# Altium PCB Micromouse_PCB.PcbDoc (part 3 of 3)
Units mm, origin at the board's own origin, x right, y up, seen from the top; angles counter-clockwise.
Board outline 89.28 x 101.5 mm, 2 copper layers (Top Layer, Bottom Layer); 118 components, 108 nets, 360 pads, 157 vias.
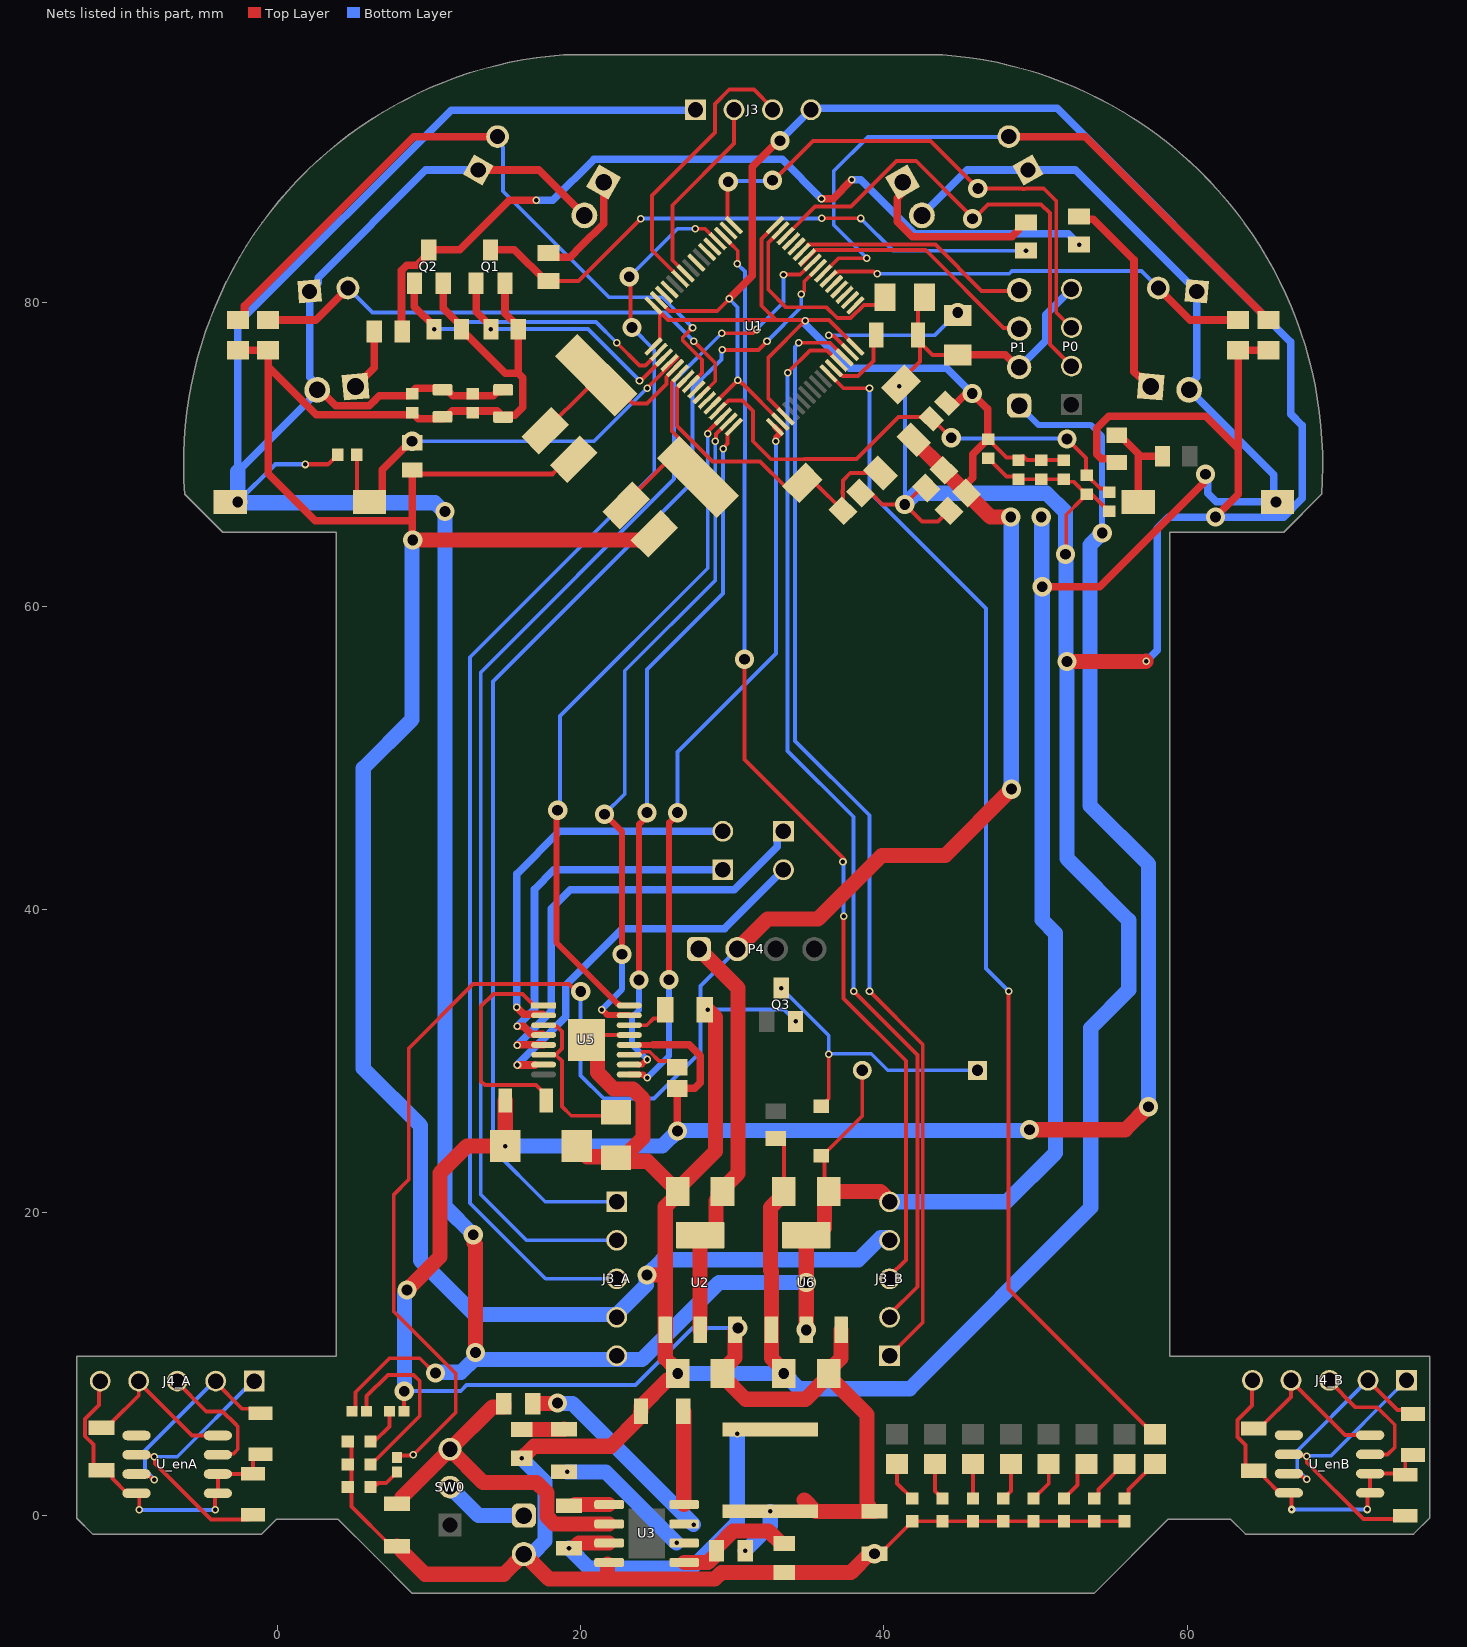
[diagram p2: the nets of this part, all layers, seen from the top]

## Via types
v1: diameter 0.5, hole 0.3, Top Layer to Bottom Layer, 87 vias
v2: diameter 1.27/1.27 (per signal layer), hole 0.711, Top Layer to Bottom Layer, 48 vias
v3: diameter 2, hole 2, Top Layer to Bottom Layer, 11 vias
v4: diameter 1.27, hole 0.711, Top Layer to Bottom Layer, 8 vias
v5: diameter 0.5, hole 0.2, Top Layer to Bottom Layer, 1 vias
v6: diameter 2/2 (per signal layer), hole 2, Top Layer to Bottom Layer, 1 vias
v7: diameter 1, hole 0.3, Top Layer to Bottom Layer, 1 vias

## Nets (pads, with @x,y where several pads share a name; then routed paths per layer and width w, separated by ;. In a path a pad name is that pad's centre, name@x,y a point inside that pad or via, vN(x,y) a via of type N, cw(c..) or ccw(c..) an arc to the next point about the centre after c; other vN are vias at no path point) (continued)
DBL_8: DBL_8.2 U1.27 | length 80
  Top Layer w0.254: U1.27@36.35,75.35 37.325,74.375 v1(39.05,74.375) ; v1(48.225,34.6) 48.225,14.95 57.825,5.35 DBL_8.2@57.875,5.35
  Bottom Layer w0.254: v1(39.05,74.375) 39.052,74.373 39.052,67.523 46.728,59.848 46.728,36.098 v1(48.225,34.6)
DEBUG: C_DB.2 DEBUG.1 R_BT.2 U1.4 | length 28.7
  Top Layer w0.254: C_DB.2@5.227,69.995 5.227,67.548 5.9,66.875 DEBUG.1@6.065,66.875 ; R_BT.2@8.851,70.899 v2(8.875,70.875) ; v1(24.375,74.375) 25.379,75.379 25.379,75.391 U1.4@26.38,76.393
  Top Layer w0.5: DEBUG.1@6.065,66.875 6.365,66.875 6.915,67.425 6.915,68.99 8.7,70.775 R_BT.2@8.875,70.775
  Bottom Layer w0.254: v2(8.875,70.875) 20.875,70.875 v1(24.375,74.375)
F_EM: Q2.1 R_IR2.2 U1.2 | length 20.1
  Top Layer w0.254: v1(22.375,77.375) 23.875,75.875 24.26,75.875 U1.2@25.149,76.764
  Top Layer w0.5: Q2.1@9.025,81.3 9.025,79.75 10.325,78.45 v1(10.325,78.275)
  Bottom Layer w0.254: v1(10.325,78.275) 12.094,78.275 12.571,78.752 20.998,78.752 v1(22.375,77.375)
GND: C1.2 C2.2 C3.1 C4.2 C5.2 C6.2 C7.2 C8.2 C9.2 C10.2 C11.1 C12.2 C13.2 C16.2 C17.2 C18.2 C19.1 C21.2 C22.2 C23.2 C24.2 C27.1 C_IR1.2 C_IR2.1 C_IR3.1 C_IR4.2 D1.1 D3.1 D5.1 D6.1 D7.1 D8.1 D9.1 D10.1 D11.1 D12.1 D13.1 J3.04 J3_A.04 J3_B.04 P0.04 P1.2 P3.2 Q1.2 Q2.2 Q3.2 R5.1 R7.1 R9.2 R12.2 R_BT0_2.1 R_BT.1 R_BUZZ.1 R_IR1.1 R_IR2.1 R_IR7.1 R_IR8.1 R_IR9.1 R_IR10.1 RST.2 U1.12 U1.18 U1.63 U2.1 U3.4 U5.13 U5.17 U6.1 | length 603.2
  Top Layer w0.254: D3.1@4.875,4.875 4.875,0.6 7.5,-2.025 C12.2@7.875,-2.025 ; U5.17@20.375,31.375 20.7,31.7 U5.13@23.2,31.7 ; U1.63@25.149,80.186 25.856,79.479 29.004,79.479 29.796,80.271 v1(29.796,80.275) ; U1.12@28.685,73.229 30.352,74.896 v1(30.352,74.9) ; v1@30.352,74.853 30.466,74.853 30.643,74.675 30.66,74.675 U1.18@33.168,72.168 U1.18@33.589,71.747 ; R_BUZZ.1@32.875,24.875 33.026,24.875 33.399,24.502 C24.2@33.399,21.375 ; C3.1@38.459,67.459 39.141,67.459 39.892,66.708 v4(41.382,66.708) 42.512,65.578 43.578,65.578 C5.2@44.291,66.291 ; C16.2@39.75,-2.525 41.602,-0.673 41.602,-0.648 D5.1@41.875,-0.375 D6.1@43.875,-0.375 D7.1@45.875,-0.375 D8.1@47.875,-0.375 D9.1@49.875,-0.375 D10.1@51.875,-0.375 D11.1@53.875,-0.375 D12.1@55.875,-0.375 ; RST.2@41.124,74.897 42.375,76.148 R9.2@42.375,77.399 ; v4@41.475,66.8 42.466,67.791 C4.2@42.791,67.791 ; C27.1@42.675,80.375 42.251,79.951 R9.2@42.251,77.875 42.251,77.523 R9.2@42.375,77.399 ; C11.1@44.875,76.575 43.199,76.575 R9.2@42.375,77.399 ; C6.2@46.875,69.748 46.902,69.748 48.088,68.562 48.688,68.562 C7.2@48.875,68.375 C8.2@50.375,68.375 C9.2@51.875,68.375 52.04,68.21 52.513,68.21 C22.2@53.348,67.375 ; v2(51.975,63.425) 52.032,63.482 52.032,66.032 53.096,67.096 53.096,67.123 C22.2@53.348,67.375 ; C22.2@53.375,67.375 C22.2@53.348,67.375 ; C22.2@53.435,67.462 53.57,67.328 53.768,67.328 54.848,66.248 C10.2@54.875,66.248
  Top Layer w0.3: R_BT.1@8.875,68.975 9.135,68.715 18.139,68.715 19.124,69.7 C1.2@19.525,69.7
  Top Layer w0.5: R_IR10.1@-2.625,76.875 R_IR9.1@-0.625,76.875 -0.625,75.802 ; 8.764,65.625 2.475,65.625 -0.625,68.725 -0.625,75.802 ; v2@8.875,64.391 R_BT.1@8.875,68.975 ; C_IR1.2@10.875,72.375 9.275,72.375 9.031,72.619 9.004,72.619 C_IR2.1@8.875,72.748 8.746,72.619 8.43,72.619 8.426,72.615 2.562,72.615 -0.625,75.802 ; C_IR1.2@10.875,72.485 11.145,72.485 11.535,72.875 14.475,72.875 C_IR3.1@14.875,72.475 15.005,72.605 15.647,72.605 16.175,73.133 16.175,75.075 15.875,75.375 ; Q2.2@10.925,81.3 10.925,79.65 12.125,78.45 R_IR2.1@12.125,78.275 15.025,75.375 15.875,75.375 ; Q1.2@15,81.3 15,79.325 15.875,78.45 R_IR1.1@15.875,78.275 15.875,75.375 ; v1(29.796,80.275) 30.678,81.157 30.682,81.157 31.31,81.785 31.31,88.98 33.034,90.704 v2(33.144,90.704) ; C11.1@44.875,76.575 48,76.575 48.74,75.835 P1.2@48.875,75.835 ; R_BT0_2.1@55.375,69.475 55.125,69.725 54.343,69.725 54.05,70.018 54.05,71.725 54.85,72.525 61.225,72.525 63.375,70.375 ; v2(61.875,65.875) 63.375,67.375 63.375,70.375 ; R_IR8.1@65.221,76.875 R_IR7.1@63.375,76.875 63.375,70.375
  Top Layer w1: C12.2@7.875,-2.025 7.9,-2.05 8.225,-2.05 8.225,-2.375 9.725,-3.875 14.92,-3.875 P3.2@16.25,-2.545 17.895,-4.19 21.775,-4.19 ; v2(8.911,64.355) 8.913,64.356 24.455,64.356 C2.2@24.862,64.763 ; R5.1@16.305,3.779 16.305,3.973 16.906,4.574 21.999,4.574 23.95,6.525 23.95,6.85 C13.2@23.975,6.875 ; C19.1@19.735,24.375 19.735,24.305 20.23,23.81 20.274,23.81 20.409,23.675 22.075,23.675 R12.2@22.375,23.375 ; U5.17@20.375,31.375 21.105,30.645 21.105,29.222 22.181,28.146 23.445,28.146 24.104,27.487 24.104,24.929 22.55,23.375 24.399,23.375 25.946,21.828 26.122,21.828 C18.2@26.399,21.551 ; U3.4@21.775,-3.19 21.775,-4.19 ; C13.2@23.975,7.2 25.697,8.922 26.122,8.922 26.399,9.199 v2(26.399,9.375) 26.122,9.652 26.122,9.828 25.575,10.375 U2.1@25.575,12.25 25.575,20.375 ; v2(24.375,15.875) 25.475,15.875 ; C18.2@25.646,20.446 26.399,21.199 C18.2@26.399,21.375 C18.2@26.399,21.551 ; v1(28.375,33.375) 28.879,32.871 28.879,24.031 C18.2@26.399,21.551 ; v2(33.399,9.375) 33.399,9.551 32.575,10.375 U6.1@32.575,12.25 32.575,16.114 32.521,16.168 32.521,20.321 33.122,20.922 33.122,21.098 C24.2@33.399,21.375 ; v2(39.375,-2.525) 39.05,-2.525 37.824,-3.751 R7.1@33.425,-3.751 29.278,-3.751 28.84,-4.19 21.775,-4.19 ; v4(52.075,56.35) 52.198,56.35 52.2,56.352 57.277,56.352 v1(57.3,56.375)
  Bottom Layer w0.254: v1(28.375,33.375) 33.4,33.375 v1(34.175,32.6) ; v1(29.796,80.275) 30.352,79.719 v1(30.352,74.9) ; v1(41.027,74.515) 41.027,74.449 41.382,74.094 41.382,66.893 v4@41.475,66.8
  Bottom Layer w0.5: v2(33.144,90.704) J3.04@35.19,92.75 ; J3.04@35.13,92.81 35.171,92.85 51.425,92.85 66.85,77.425 66.85,72.675 67.611,71.914 67.611,67.111 66.375,65.875 v2(61.875,65.875) 58.775,65.875 58.025,65.125 58.025,57.1 v1(57.3,56.375) ; P1.2@48.925,75.77 50.672,77.517 50.672,79.212 P0.04@52.375,80.915
  Bottom Layer w1: v2(8.911,64.355) 8.875,64.319 8.875,52.525 5.65,49.3 5.65,29.5 9.425,25.725 9.425,16.825 12.995,13.255 22.375,13.255 22.496,13.134 22.496,13.376 24.323,15.203 24.323,15.75 v2@24.408,15.835 ; v1(16.104,3.772) 17.65,2.226 17.65,-1.659 16.879,-2.43 16.365,-2.43 P3.2@16.25,-2.545 ; v2(24.375,15.875) 25.375,16.875 38.335,16.875 39.795,18.335 J3_B.04@40.375,18.335 ; v2(26.399,9.375) v2(33.399,9.375) 34.407,8.367 41.703,8.367 53.65,20.314 53.65,32.175 56.15,34.675 56.15,39.275 52.075,43.35 v4(52.075,56.35) 52.025,56.4 52.025,63.375 v2(51.975,63.425) 51.975,66.202 50.727,67.45 42.125,67.45 41.475,66.8 v4(41.382,66.708) ; v2@39.35,-2.55 v2(39.375,-2.525)
GND_inA: C_enA.2 J4_A.04 U_enA.4 | length 11.1
  Top Layer w0.254: C_enA.2@-11.625,5.8 -11.25,5.8 -10.902,6.148 -10.902,6.193 -9.165,7.93 J4_A.04@-9.165,8.871 ; J4_A.04@-9.245,8.875 -5.65,5.28 U_enA.4@-3.943,5.28
GND_inB: C_enB.2 J4_B.04 U_enB.4 | length 11.2
  Top Layer w0.254: C_enB.2@64.296,5.662 63.967,5.745 C_enB.2@64.4,5.745 ; C_enB.2@65.05,6.02 66.86,7.83 J4_B.04@66.86,8.92 ; J4_B.04@66.82,8.9 70.415,5.305 U_enB.4@72.082,5.305
IN1: U1.14 U5.16 | length 45.8
  Top Layer w0.254: U5.16@22.5,33.75 22.5,33.748 22.597,33.65 U5.16@23.2,33.65 ; v1(28.375,71.375) 28.422,71.422 28.422,71.552 U1.14@29.392,72.521
  Top Layer w0.4: v2(18.475,46.525) 18.4,46.45 18.4,37.793 22.442,33.75 U5.16@22.5,33.75
  Bottom Layer w0.254: v2(18.475,46.525) 18.625,46.675 18.625,52.75 28.375,62.5 v1(28.375,71.375)
IN2: U1.15 U5.15 | length 45.8
  Top Layer w0.254: U5.15@23.2,33 U5.15@23.803,33 ; v1(28.875,70.875) 28.922,70.922 28.922,71.344 U1.15@29.745,72.168
  Top Layer w0.4: v1(21.375,33.375) 21.402,33.375 21.717,33.06 21.729,33.06 21.78,33.01 23.191,33.01 U5.15@23.2,33 ; v2(21.575,46.275) 22.725,45.125 v2(22.725,37.025)
  Bottom Layer w0.254: v2(21.575,46.275) 22.907,47.607 22.907,55.732 28.875,61.7 v1(28.875,70.875)
  Bottom Layer w0.4: v1(21.375,33.375) 22.725,34.725 v2(22.725,37.025)
IN3: U1.16 U5.10 | length 45.3
  Top Layer w0.254: v1(29.398,70.375) 29.398,70.442 29.678,70.722 29.678,71.394 U1.16@29.875,71.59
  Top Layer w0.4: U5.10@23.828,29.76 24.035,29.76 24.364,30.088 v1(24.391,30.088) ; v2(23.85,35.325) 23.85,45.615 24.375,46.14 v2(24.375,46.375)
  Bottom Layer w0.254: v2(24.375,46.375) 24.375,55.825 29.375,60.825 29.375,70.352 v1(29.398,70.375)
  Bottom Layer w0.4: v2(23.85,35.325) 23.85,33.355 23.375,32.88 23.375,31.104 v1(24.391,30.088)
IN4: U1.17 U5.9 | length 48
  Top Layer w0.4: U5.9@23.2,29.1 23.818,29.1 23.828,29.09 24.133,29.09 24.348,28.875 v1(24.375,28.875) ; v2(25.825,35.35) 25.825,45.706 26.375,46.256 v2(26.375,46.375) ; U1.17@32.814,71.814 33.15,71.478 33.15,71.394 32.894,71.138 32.894,70.894 v1(32.875,70.875)
  Bottom Layer w0.254: v2(26.375,46.375) 26.375,50.375 32.875,56.875 v1(32.875,70.875)
  Bottom Layer w0.4: v1(24.375,28.875) 25.825,30.325 v2(25.825,35.35)
L_RV: DS6.2 R_IR10.2 U1.8 | length 47.3
  Top Layer w0.254: U1.8@27.271,74.643 28,75.372 28,76.25 26.73,77.52 26.73,77.73 v1(27.375,78.375)
  Top Layer w0.5: R_IR10.2@-2.625,78.875 -2.532,78.875 -2.182,79.225 -2.182,79.818 8.975,90.975 DS6.2@14.51,90.975
  Bottom Layer w0.254: DS6.2@14.51,90.975 14.51,90.638 14.875,90.273 14.875,87.375 21.875,80.375 25.375,80.375 v1(27.375,78.375)
LF_RV: DS7.2 R_IR9.2 U1.10 | length 34.9
  Top Layer w0.254: v1(27.462,77.462) 28.875,76.05 28.875,74.833 U1.10@27.978,73.936
  Top Layer w0.5: R_IR9.2@-0.625,78.875 2.529,78.875 DS7.2@4.64,80.986
  Bottom Layer w0.254: DS7.2@4.64,80.986 6.251,79.375 25.55,79.375 v1(27.462,77.462)
LR_EM: Q1.1 R_IR1.2 U1.3 | length 16.9
  Top Layer w0.254: v1(23.875,74.875) 23.922,74.922 24.014,74.922 U1.3@25.503,76.411
  Top Layer w0.5: Q1.1@13.1,81.3 13.1,79.425 14.075,78.45 v1(14.075,78.275)
  Bottom Layer w0.254: v1(14.075,78.275) 20.475,78.275 v1(23.875,74.875)
Net3_2: 3.2 U3.7 | length 14
  Top Layer w1: 3.2@16.826,7.375 16.826,7.393 16.829,7.396 18.443,7.396 v4(18.464,7.417)
  Bottom Layer w1: v4(18.464,7.417) 18.489,7.392 19.458,7.392 v1(27.45,-0.6)
NetBOOT0_1: BOOT0.1 R_BT0_1.2 R_BT0_2.2 | length 6.7
  Top Layer w0.5: R_BT0_2.2@55.375,71.275 55.55,71.275 56.95,69.875 R_BT0_1.2@58.375,69.875 ; BOOT0.1@56.78,66.875 56.78,70.045
NetC1_1: C1.1 U1.5 Y1.2 | length 11.2
  Top Layer w0.254: C1.1@17.651,71.575 20.51,74.434 21.816,74.434 Y1.2@22.254,73.996 ; Y1.2@22.339,73.629 23.192,73.629 23.446,73.375 24.375,73.375 25.65,74.65 25.65,75.125 26.21,75.685 U1.5@26.21,75.703
NetC2_1: C2.1 U1.6 Y1.1 | length 13.8
  Top Layer w0.254: C2.1@23.025,66.875 25.548,69.397 25.917,69.397 26.798,68.516 Y1.1@27.734,68.516 27.734,69.822 26.004,71.552 26.004,74.753 26.482,75.231 U1.6@26.482,75.25
NetC3_2: C3.2 R2.2 RST.1 U1.7 | length 21.4
  Top Layer w0.254: U1.7@26.835,74.896 26.835,74.878 26.358,74.4 26.358,71.892 28.701,69.549 31.826,69.549 33.462,67.914 34.414,67.914 RST.1@34.626,68.126 35.456,68.126 C3.2@37.291,66.291 37.22,66.362 37.22,67.07 37.291,67.141 37.291,67.419 37.273,67.436 37.273,67.624 37.291,67.642 37.291,68.291 37.779,68.779 R2.2@39.779,68.779
NetC11_2: C11.2 U1.31 | length 11
  Top Layer w0.254: v1(36.375,77.875) 36.422,77.828 36.7,77.828 U1.31@37.764,76.764
  Bottom Layer w0.254: v1(36.375,77.875) 43.375,77.875 v2(44.875,79.375)
NetC13_1: C13.1 U3.8 | length 6.2
  Top Layer w1: C13.1@26.775,6.875 26.8,6.85 26.8,0.745 U3.8@26.825,0.72
NetC14_1: C14.1 U3.6 | length 9.2
  Bottom Layer w1: v1(19.1,2.875) 21.65,2.875 v1(26.325,-1.8)
NetC14_2: C14.2 R5.2 | length 2.8
  Top Layer w1: R5.2@16.101,5.677 16.104,5.68 18.88,5.68 C14.2@18.9,5.7
NetC15_1: C15.1 U3.1 | length 2.3
  Top Layer w1: C15.1@19.575,0.675 19.62,0.72 U3.1@21.875,0.72
NetC15_2: C15.2 L3.1 U3.3 | length 21.2
  Top Layer w1: C15.2@19.55,-2.15 19.88,-1.82 U3.3@21.875,-1.82
  Bottom Layer w1: v1(19.225,-2.15) 20.55,-3.475 27.3,-3.475 30.325,-0.45 v1(30.325,5.4)
NetC20_2: C20.2 U5.11 | length 3.4
  Top Layer w0.254: U5.11@23.2,30.4 23.872,30.4 24.071,30.599 24.554,30.599 25.156,29.998 25.827,29.998 25.875,29.95 C20.2@25.875,29.575
NetC21_1: C21.1 U5.14 | length 3
  Top Layer w0.254: U5.14@23.2,32.35 24.356,32.35 24.793,32.787 25.152,32.787 25.375,33.01 C21.1@25.375,33.517
NetC27_2: C27.2 U1.47 | length 13.3
  Top Layer w0.254: U1.47@33.168,84.783 32.375,83.99 32.375,80.875 33.537,79.713 36.212,79.713 36.923,79.002 37.805,79.002 38.679,79.875 39.575,79.875 C27.2@40.075,80.375
NetD1_2: D1.2 R3.2 | length 1.9
  Top Layer w0.254: D1.2@6.375,1.875 6.648,2.148 7.169,2.148 7.875,2.854 R3.2@7.875,2.875
NetD3_2: D3.2 R10.2 | length 2.4
  Top Layer w0.254: D3.2@6.375,4.875 7.375,5.875 R10.2@7.375,6.875
NetD4_2: D4.2 LS1.1 Q3.3 | length 19.6
  Top Layer w0.254: D4.2@35.875,27.01 35.945,27.01 36.258,27.323 36.258,27.393 36.366,27.501 v1(36.366,30.428)
  Bottom Layer w0.254: v1(33.225,34.8) 36.366,31.659 v1(36.366,30.428) 36.403,30.465 39.163,30.465 40.253,29.375 LS1.1@46.175,29.375
NetD5_2: D5.2 DBL_1.1 | length 2.7
  Top Layer w0.254: DBL_1.1@40.875,3.4 40.875,2.125 D5.2@41.875,1.125
NetD6_2: D6.2 DBL_2.1 | length 2.5
  Top Layer w0.254: DBL_2.1@43.375,3.4 43.375,1.625 D6.2@43.875,1.125
NetD7_2: D7.2 DBL_3.1 | length 2.3
  Top Layer w0.254: D7.2@45.875,1.125 DBL_3.1@45.875,3.4
NetD8_2: D8.2 DBL_4.1 | length 2.5
  Top Layer w0.254: D8.2@47.875,1.125 48.375,1.625 DBL_4.1@48.375,3.4
NetD9_2: D9.2 DBL_5.1 | length 2.7
  Top Layer w0.254: D9.2@49.875,1.125 50.875,2.125 DBL_5.1@50.875,3.4
NetD10_2: D10.2 DBL_6.1 | length 2.9
  Top Layer w0.254: D10.2@51.875,1.125 52.777,2.027 52.777,2.852 53.325,3.4 DBL_6.1@53.375,3.4
NetD11_2: D11.2 DBL_7.1 | length 3.1
  Top Layer w0.254: D11.2@53.875,1.125 54.148,1.398 54.148,1.723 55.825,3.4 DBL_7.1@55.875,3.4
NetD12_2: D12.2 DBL_8.1 | length 3.1
  Top Layer w0.254: D12.2@55.875,1.125 56.148,1.398 56.148,1.723 57.825,3.4 DBL_8.1@57.875,3.4
NetD13_2: D13.2 R13.2 | length 11.8
  Top Layer w0.254: R13.2@5.875,6.875 5.875,7.875 7.275,9.275 8.975,9.275 9.375,8.875 9.375,6.565 6.458,3.648 6.398,3.648 6.375,3.625 D13.2@6.375,3.565
NetDS1_1: DS1.1 R_IR3.2 | length 4.2
  Top Layer w0.5: DS1.1@5.14,74.486 6.375,75.721 R_IR3.2@6.375,78.125
NetDS2_1: DS2.1 R_IR4.2 | length 7.4
  Top Layer w0.5: R_IR4.2@17.875,83.3 18.15,83.025 19.295,83.025 20.039,83.769 21.51,85.24 DS2.1@21.51,87.975
NetDS3_1: DS3.1 R_IR6.2 | length 12.2
  Top Layer w0.5: DS3.1@41.24,87.975 41.24,87.271 40.875,86.906 40.875,85.375 41.875,84.375 48.45,84.375 48.9,84.825 48.9,85.025 49.175,85.3 R_IR6.2@49.375,85.3
NetDS4_1: DS4.1 R_IR5.2 | length 13.8
  Top Layer w0.5: R_IR5.2@52.668,85.525 53.825,85.525 56.5,82.85 56.5,75.475 56.82,75.155 56.941,75.155 DS4.1@57.61,74.486
NetLabel24: U1.45
NetLabel27: U1.50
NetLabel44: U1.54
NetLabel48: U1.53
NetLabel80: U1.56
NetLabel85: U1.37
NetLabel86: U1.44
NetLabel90: U1.61
NetLabel91: U1.62
NetLabel92: U1.33
NetLabel93: U1.34
NetLabel94: U1.35
NetLabel95: U1.36
NetLabel96: U1.9
NetLabel97: U1.11
NetP3_1: P3.1 SW0.2 | length 5.7
  Bottom Layer w1: SW0.2@11.375,1.875 13.255,-0.005 P3.1@16.25,-0.005
NetQ1_3: Q1.3 R_IR4.1 R_IR6.1 | length 38.8
  Top Layer w0.254: R_IR4.1@17.675,81.45 19.85,81.45 v1(23.95,85.55) ; v1(35.887,85.588) 38.463,85.588 v1(38.475,85.575)
  Top Layer w0.5: Q1.3@14.05,83.5 15.625,83.5 R_IR4.1@17.675,81.45
  Bottom Layer w0.254: v1(23.95,85.55) 23.969,85.569 35.869,85.569 v1(35.887,85.588) ; v1(38.475,85.575) 40.6,83.45 v1(49.375,83.45)
NetQ2_3: Q2.3 R_IR3.1 R_IR5.1 | length 55.3
  Top Layer w0.5: R_IR3.1@8.225,78.125 8.175,78.175 8.175,82.145 8.529,82.499 9.174,82.499 9.975,83.3 Q2.3@9.975,83.5 12.013,83.5 15.288,86.775 v1(17.075,86.775) ; v1(35.883,86.887) 36.657,86.887 v1(37.893,88.123)
  Bottom Layer w0.5: v1(17.075,86.775) 18.165,86.775 20.876,89.486 33.285,89.486 v1(35.883,86.887) ; v1(37.893,88.123) 38.465,88.123 42.023,84.565 52.16,84.565 v1(52.875,83.85)
NetR7_2: R7.2 R8.2 U3.5 | length 8
  Top Layer w1: U3.5@26.825,-3.09 28.384,-3.09 28.948,-2.526 28.948,-2.124 30.052,-1.021 32.395,-1.021 33.224,-1.85 R7.2@33.425,-1.85
NetR11_2: R11.2 U5.1 | length 14.8
  Top Layer w0.254: U5.1@17.55,33.65 16.912,33.65 16.154,34.408 14.233,34.408 13.398,33.573 13.398,28.677 13.673,28.402 17.048,28.402 17.725,27.725 R11.2@17.725,27.375
NetR12_1: R12.1 U5.3 U5.6 | length 11.2
  Top Layer w0.254: U5.6@17.55,30.4 18.345,30.4 18.764,29.981 18.764,26.986 19.375,26.375 R12.1@22.375,26.375 ; U5.3@17.55,32.35 18.221,32.35 18.3,32.271 18.355,32.271 18.424,32.271 18.758,31.937 18.758,30.813 18.424,30.479
OUT1: J1.01 U5.4 | length 24.4
  Top Layer w0.5: v1(15.8,32.275) 16.223,32.275 16.738,31.76 U5.4@17.49,31.76
  Bottom Layer w0.5: v1(15.8,32.275) 16.95,33.425 16.95,41.325 18.23,42.605 J1.01@29.375,42.605
OUT2: J1.02 U5.2 | length 25.5
  Top Layer w0.5: v1(15.775,33.525) 16.241,33.06 U5.2@17.49,33.06
  Bottom Layer w0.5: v1(15.775,33.525) 15.775,42.325 18.595,45.145 J1.02@29.375,45.145
OUT3: J2.01 U5.5 | length 29.5
  Top Layer w0.5: v1(15.8,31.025) 15.825,31.05 U5.5@17.55,31.05
  Bottom Layer w0.5: v1(15.8,31.025) 18.058,33.283 18.058,40.033 19.3,41.275 30.117,41.275 32.966,44.124 32.966,44.736 J2.01@33.375,45.145
OUT4: J2.02 U5.7 | length 25.2
  Top Layer w0.5: v1(15.825,29.725) U5.7@16.972,29.725
  Bottom Layer w0.5: v1(15.825,29.725) 19.008,32.908 19.008,34.986 22.734,38.712 29.482,38.712 J2.02@33.375,42.605
OUT_A: J4_A.03 U_enA.3 | length 8.3
  Top Layer w0.254: J4_A.03@-6.705,8.875 -4.705,6.875 -3.644,6.875 -2.778,6.028 -2.629,5.879 -2.629,4.371 -2.919,4.081 -3.872,4.081 U_enA.3@-3.943,4.01
OUT_B: J4_B.03 U_enB.3 | length 8.8
  Top Layer w0.254: J4_B.03@69.36,8.9 71.12,7.14 72.55,7.14 73.7,5.99 73.7,4.5 73.235,4.035 U_enB.3@72.082,4.035
OUT_enA: J3_A.03 U1.52 | length 86.1
  Top Layer w0.254: v4(23.2,81.725) 23.287,81.638 23.287,78.463 v2(23.375,78.375) ; v1(27.55,84.9) 28.195,84.9 29.02,84.076 U1.52@29.038,84.076
  Bottom Layer w0.254: J3_A.03@22.375,15.62 17.686,15.62 12.7,20.606 12.7,56.625 24.852,68.777 24.852,76.898 v2(23.375,78.375) ; v4(23.2,81.725) 26.375,84.9 v1(27.55,84.9)
OUT_enB: J3_B.03 U1.51 | length 74.1
  Top Layer w0.254: U1.51@29.393,84.409 29.869,83.934 29.869,83.931 30.358,83.442 30.358,82.608 v1(30.325,82.575) ; v2(30.8,56.5) 30.8,49.875 37.338,43.337 v1@37.338,43.125 ; v1@37.338,39.525 37.338,34.112 41.449,30.001 41.449,16.869 J3_B.03@40.375,15.795
  Bottom Layer w0.254: v1(30.325,82.575) 30.829,82.071 30.829,69.535 30.8,69.506 v2(30.8,56.5) ; v1(37.3,43.125) 37.325,43.1 37.325,39.55 v1(37.35,39.525)
PB2: R9.1 U1.28 | length 4.9
  Top Layer w0.254: U1.28@36.703,75.703 36.722,75.703 37.25,75.175 38.3,75.175 39.307,76.182 39.307,77.683 R9.1@39.437,77.813
PushA: U_enA.5
PushB: U_enB.5
R_RV: DS8.2 R_IR8.2 U1.39 | length 44.6
  Top Layer w0.254: U1.39@35.996,81.954 36.993,82.951 v1(38.878,82.951)
  Top Layer w0.5: DS8.2@48.24,90.975 53.275,90.975 R_IR8.2@65.375,78.875
  Bottom Layer w0.254: v1(38.878,82.951) 36.695,85.134 36.695,88.703 38.942,90.95 48.215,90.95 DS8.2@48.24,90.975
RF_RV: DS5.2 R_IR7.2 U1.38 | length 28.7
  Top Layer w0.254: U1.38@36.35,81.601 36.771,82.021 36.959,82.021 37.016,82.078 39.33,82.078 39.483,81.925 v1(39.55,81.925)
  Top Layer w0.5: DS5.2@58.11,80.986 60.221,78.875 R_IR7.2@63.375,78.875
  Bottom Layer w0.254: v1(39.55,81.925) 48.269,81.925 48.443,82.1 56.996,82.1 DS5.2@58.11,80.986
RX: P1.4 U1.43 | length 15.2
  Top Layer w0.254: U1.43@35.003,83.847 43.403,83.847 46.45,80.8 48.875,80.8 P1.4@48.925,80.85
SCL: J3.02 U1.58 | length 12.8
  Top Layer w0.254: U1.58@26.917,81.954 26.05,82.821 26.05,86.45 30.11,90.51 J3.02@30.11,92.75
SCL_A: J4_A.02 R18.1 U_enA.7 | length 13.9
  Top Layer w0.254: U_enA.7@-9.307,2.74 -8.588,2.74 -8.27,2.422 -8.172,2.422 v1(-8.125,2.375) ; J4_A.02@-4.165,8.875 -2.338,7.048 -1.448,7.048 R18.1@-1.125,6.725
  Bottom Layer w0.254: v1(-8.125,2.375) -8.756,3.006 -8.756,4.284 J4_A.02@-4.165,8.875
SCL_B: J4_B.02 R16.1 U_enB.7 | length 13.9
  Top Layer w0.254: U_enB.7@66.718,2.765 67.437,2.765 67.755,2.447 67.853,2.447 v1(67.9,2.4) ; J4_B.02@71.94,8.92 73.892,6.968 74.682,6.968 R16.1@74.9,6.75
  Bottom Layer w0.254: v1(67.9,2.4) 67.269,3.031 67.269,4.269 J4_B.02@71.9,8.9
SCL_enA: J3_A.02 U1.41 | length 82.7
  Top Layer w0.254: v1(29.3,78) 31.353,78 31.603,78.25 v1(31.625,78.25) ; v1(33.375,81.875) 34.484,81.875 35.271,82.661 U1.41@35.289,82.661
  Bottom Layer w0.254: J3_A.02@22.375,18.16 16.416,18.16 13.4,21.176 13.4,55.625 26.15,68.375 26.15,74.85 v1(29.3,78) ; v1(31.625,78.25) 31.625,78.3 33.375,80.05 v1(33.375,81.875)
SCL_enB: J3_B.02 U1.29 | length 70.8
  Top Layer w0.254: v1(33.65,75.4) 35.125,76.875 36.239,76.875 U1.29@37.057,76.057 ; v1(38,34.6) 42.211,30.389 42.211,15.091 J3_B.02@40.375,13.255
  Bottom Layer w0.254: v1(33.65,75.4) 33.65,50.45 38,46.1 v1(38,34.6)
SDA: J3.03 U1.59 | length 18.8
  Top Layer w0.254: U1.59@26.564,81.601 26.564,81.619 24.7,83.483 24.7,87.1 28.85,91.25 28.85,93.125 29.8,94.075 31.426,94.075 32.65,92.851 J3.03@32.65,92.75
SDA_A: J4_A.01 R19.1 U_enA.6 | length 18.4
  Top Layer w0.254: U_enA.6@-9.307,4.01 -9.236,3.938 -8.255,3.938 -8.192,3.875 v1(-8.125,3.875) -8.078,3.828 -8.078,3.436 -4.386,-0.256 -1.906,-0.256 R19.1@-1.625,0.025
  Bottom Layer w0.254: v1(-8.125,3.875) -6.625,3.875 J4_A.01@-1.625,8.875
SDA_B: J4_B.01 R17.1 U_enB.6 | length 18.4
  Top Layer w0.254: U_enB.6@66.718,4.035 66.789,3.963 67.77,3.963 67.833,3.9 v1(67.9,3.9) 67.9,3.508 71.639,-0.231 74.119,-0.231 R17.1@74.4,0.05
  Bottom Layer w0.254: v1(67.9,3.9) 67.947,3.947 69.487,3.947 73.902,8.362 73.922,8.362 74.44,8.88 J4_B.01@74.44,8.9
SDA_enA: J3_A.01 U1.40 | length 78
  Top Layer w0.254: v1(29.325,76.9) 31.727,76.9 v1(32.288,77.462) ; v1(34.55,80.575) 34.744,80.769 34.744,81.409 U1.40@35.643,82.308
  Bottom Layer w0.254: J3_A.01@22.375,20.7 17.662,20.7 14.21,24.151 14.21,55.036 27.375,68.2 27.375,74.375 29.278,76.278 29.278,76.853 v1(29.325,76.9) ; v1(32.288,77.462) 34.55,79.723 v1(34.55,80.575)
SDA_enB: J3_B.01 U1.30 | length 74.7
  Top Layer w0.254: v1(34.375,77.375) 36.446,77.375 U1.30@37.411,76.411 ; v1(39.05,34.6) 42.565,31.085 42.565,12.73 40.55,10.715 J3_B.01@40.375,10.715
  Bottom Layer w0.254: v1(34.375,77.375) 34.375,77.339 34.14,77.103 34.14,51.11 39.05,46.2 v1(39.05,34.6)
SWCLK: P0.03 U1.49 | length 36.2
  Top Layer w0.254: v2(29.725,88) 29.678,87.953 29.678,85.557 U1.49@30.005,85.23 ; v2@32.625,87.975 35.325,90.675 43.075,90.675 v2(46.2,87.55) 49.115,87.55 49.141,87.524 49.296,87.524 49.409,87.55 50.55,87.55 51.375,86.725 51.375,79.375 P0.03@52.375,78.375
  Bottom Layer w0.254: v2(29.725,88) 29.775,88.05 32.6,88.05 v2(32.65,88.1)
SWDIO: P0.02 U1.46 | length 32.4
  Top Layer w0.254: U1.46@33.521,84.429 35.45,86.358 37.83,86.358 40.835,89.363 42.137,89.363 45.85,85.65 v2(45.85,85.55) 45.925,85.55 46.875,86.5 50.375,86.5 50.95,85.925 50.95,77.26 P0.02@52.375,75.835
TX: P1.3 U1.42 | length 16.9
  Top Layer w0.254: U1.42@34.545,82.545 35.493,83.493 42.757,83.493 47.893,78.357 48.893,78.357 P1.3@48.95,78.3
V33: BOOT0.2 C24.1 C_DB.1 C_IR1.1 C_IR2.2 C_IR3.2 C_IR4.1 D4.1 DEBUG.2 DS1.2 DS2.2 DS3.2 DS4.2 DS5.1 DS6.1 DS7.1 DS8.1 J3.01 J3_A.05 J3_B.05 LS1.2 R13.1 U6.2 U6.4 | length 348.6
  Top Layer w0.254: R13.1@4.918,6.875 4.927,6.875 5.136,7.084 5.136,8.136 7.375,10.375 9.375,10.375 10.351,9.399 v2(10.415,9.399) ; D4.1@35.875,23.74 D4.1@35.945,23.74 ; C24.1@36.351,21.375 36.075,21.651 36.075,23.61 D4.1@35.945,23.74 ; LS1.2@38.575,29.375 38.575,26.37 D4.1@35.945,23.74
  Top Layer w0.3: v1(1.825,69.345) 3.323,69.345 3.717,69.739 3.744,69.739 3.973,69.968 C_DB.1@3.973,69.995
  Top Layer w0.5: DS1.2@2.61,74.264 2.774,74.264 3.823,73.215 6.058,73.215 6.411,73.568 6.411,73.582 6.704,73.875 8.605,73.875 9.105,74.375 C_IR1.1@10.875,74.375 ; C_IR1.1@10.875,74.275 11.145,74.275 11.545,73.875 14.215,73.875 14.475,74.135 14.745,74.135 C_IR3.2@14.875,74.265 ; DS6.1@13.24,88.775 17.24,88.775 DS2.2@20.24,85.775 ; v2(50.45,61.275) 54.25,61.275 61.067,68.092 61.067,68.553 v2(61.214,68.7)
  Top Layer w1: v2(12.908,18.527) 12.96,18.475 12.96,17.987 13.05,17.897 v2(13.05,10.75) ; v2(34.875,12.25) v2(34.875,15.375) U6.4@34.875,18.5 35.6,18.5 36.073,18.973 36.073,21.098 C24.1@36.145,21.026 ; C24.1@36.351,21.375 39.775,21.375 40.275,20.875 J3_B.05@40.375,20.875
  Bottom Layer w0.3: v2(-2.625,66.875) -0.155,69.345 v1(1.825,69.345)
  Bottom Layer w0.5: DS6.1@13.24,88.775 9.775,88.775 2.672,81.672 2.672,81.327 DS7.1@2.11,80.764 2.11,75.089 2.61,74.589 DS1.2@2.61,74.264 2.61,74.11 -2.625,68.875 -2.625,78.65 11.45,92.725 J3.01@27.545,92.725 ; DS3.2@42.51,85.775 45.51,88.775 DS8.1@49.51,88.775 52.629,88.775 DS5.1@60.64,80.764 60.64,75.089 60.14,74.589 DS4.2@60.14,74.264 65.728,68.677 65.728,67.022 v2(65.875,66.875) 61.935,66.875 61.361,67.449 61.361,68.553 v2(61.214,68.7)
  Bottom Layer w1: v2(-2.625,66.875) -2.625,68.875 ; v2@-2.573,66.823 -2.382,66.823 10.389,66.823 10.977,66.235 v2(11.05,66.235) ; v2(10.415,9.399) 10.466,9.45 12.11,9.45 12.955,10.295 24.049,10.295 29.129,15.375 v2(34.875,15.375) ; v2@11.05,66.025 11.05,20.385 v2(12.908,18.527) ; J3_B.05@40.375,20.7 48.1,20.7 51.325,23.925 51.325,38.412 50.45,39.287 v2(50.45,61.275) 50.412,61.313 50.412,65.838 v2(50.375,65.875)
V_inA: C_enA.1 J4_A.05 R18.2 R19.2 U_enA.1 U_enA.2 U_enA.8 | length 22.6
  Top Layer w0.254: C_enA.1@-12.15,2.85 -12.15,4.679 -12.702,5.231 -12.702,6.369 -11.785,7.286 J4_A.05@-11.785,8.875 ; C_enA.1@-11.625,3 C_enA.1@-10.875,3 ; C_enA.1@-11.546,2.921 -11.171,2.921 -10.902,2.652 -10.902,2.447 -9.925,1.47 U_enA.8@-9.307,1.47 -9.299,1.47 -9.125,1.297 v1(-9.125,0.375) ; v1(-4.125,0.375) -4.125,1.297 -3.951,1.47 U_enA.1@-3.943,1.47 U_enA.2@-3.943,2.74 -1.64,2.74 -1.625,2.725 R18.2@-1.625,4.025
  Bottom Layer w0.254: v1(-9.125,0.375) v1(-4.125,0.375)
V_inB: C_enB.1 J4_B.05 R16.2 R17.2 U_enB.1 U_enB.2 U_enB.8 | length 21.2
  Top Layer w0.254: C_enB.1@63.852,2.873 63.852,4.647 63.323,5.176 63.323,6.314 64.28,7.271 J4_B.05@64.28,8.9 ; C_enB.1@65.123,2.472 66.1,1.495 U_enB.8@66.718,1.495 66.726,1.495 66.9,1.322 v5(66.9,0.4) ; v1(71.9,0.4) 71.9,1.322 72.074,1.495 U_enB.1@72.082,1.495 U_enB.2@72.082,2.765 74.385,2.765 74.4,2.75 74.4,3.727 74.723,4.05 R16.2@74.9,4.05
  Bottom Layer w0.254: v5(66.9,0.4) v1(71.9,0.4)
VDD33: C4.1 C5.1 C6.1 C7.1 C8.1 C9.1 L1.1 P4.2 R2.1 R3.1 U1.1 U1.19 U1.32 U1.48 U1.64 | length 176.6
  Top Layer w0.254: R3.1@7.875,3.832 7.993,3.95 8.914,3.95 11.75,6.786 11.75,9.364 7.667,13.447 7.667,21.192 8.65,22.175 8.65,30.825 12.9,35.075 19.22,35.075 19.718,34.578 v2(19.993,34.578) ; U1.1@24.796,77.118 25.216,77.538 U1.64@25.216,79.412 ; U1.64@24.796,79.833 U1.64@25.216,79.412 ; U1.48@32.814,85.136 32.814,85.118 31.929,84.233 31.929,79.821 32.875,78.875 ; U1.19@33.521,72.521 33.101,72.942 33.101,72.961 32.375,73.686 32.375,76.4 v1(34.8,78.825) 34.753,78.872 34.409,78.872 34.407,78.875 32.875,78.875 ; v1@34.759,78.866 36.387,78.866 38.118,77.136 U1.32@38.118,77.118 ; 44.701,68.375 44.717,68.359 ; C6.1@46.902,71.002 48.088,69.816 48.688,69.816 C7.1@48.875,69.629 ; C7.1@49.169,69.896 49.435,69.629 C8.1@50.375,69.629 C9.1@51.875,69.629 ; U1.64@25.216,79.412 25.754,78.875 32.875,78.875
  Top Layer w0.5: L1.1@44.162,73.388 44.269,73.282 44.661,73.282 45.258,73.878 45.678,73.878 v2(45.825,74.025) 46.848,73.002 46.848,71.131 46.875,71.104 C6.1@46.875,71.002 ; C5.1@45.459,67.459 45.433,67.485 45.433,68.018 45.875,68.46 45.875,70.029 C6.1@46.848,71.002
  Top Layer w1: P4.2@30.335,37.375 32.31,39.35 35.663,39.35 39.863,43.55 44.05,43.55 v4(48.425,47.925) ; R2.1@41.971,70.971 41.971,70.959 43.959,68.971 C4.1@43.959,68.959 C5.1@45.459,67.459 47.034,65.883 48.367,65.883 v2(48.375,65.875)
  Bottom Layer w0.254: v2(19.993,34.578) 19.993,29.033 21.514,27.512 24.836,27.512 27.898,30.573 27.898,34.938 P4.2@30.335,37.375
  Bottom Layer w0.5: v1(34.8,78.825) 34.8,78.601 37.701,75.7 44.15,75.7 v2(45.825,74.025)
  Bottom Layer w1: v2(48.375,65.875) 48.4,65.85 48.4,47.95 v4(48.425,47.925)
  other v1: 8.961,3.998
VDD33_OUT: C18.1 P4.1 U2.2 U2.4 | length 27.8
  Top Layer w1: P4.1@27.795,37.375 30.375,34.795 30.375,22.575 C18.1@29.073,21.273 ; U2.2@27.875,12.25 U2.4@27.875,18.5 28.55,18.5 28.925,18.875 28.925,20.773 29.351,21.199 C18.1@29.351,21.375
VDDA: C10.1 C22.1 L1.2 U1.13 | length 32.8
  Top Layer w0.254: U1.13@29.038,72.875 29.057,72.875 29.757,73.575 30.67,73.575 31.375,72.87 31.375,70.875 32.558,69.692 34.739,69.692 34.744,69.696 38.196,69.696 40.968,72.468 43.03,72.468 L1.2@43.136,72.362 43.183,72.362 v2(44.442,71.103) ; v2(52.075,71.025) 53.325,69.775 53.325,68.679 C22.1@53.375,68.629 53.402,68.629 54.277,67.754 54.623,67.754 C10.1@54.875,67.502
  Bottom Layer w0.254: v2(44.442,71.103) 44.481,71.064 52.036,71.064 v2(52.075,71.025)
VIN74: 3.1 C12.1 SW0.3 U3.2 | length 23.3
  Top Layer w1: C12.1@8.225,0.8 8.225,1.225 SW0.3@11.375,4.375 ; 3.1@14.924,7.375 14.924,7.174 14.921,7.171 14.171,7.171 SW0.3@11.375,4.375 ; U3.2@21.875,-0.55 18.251,-0.55 17.775,-0.073 17.775,1.5 17.085,2.19 13.56,2.19 SW0.3@11.375,4.375
VOUT5: C16.1 C17.1 C19.2 C20.1 C23.1 L3.2 P1.1 R8.1 R10.1 R11.1 U2.3 U5.12 U6.3 | length 188.8
  Top Layer w0.254: R10.1@8.332,6.875 8.346,6.888 8.346,8.19 v2(8.359,8.204)
  Top Layer w0.4: U5.12@23.2,31.05 24.778,31.05
  Top Layer w0.5: 24.778,31.05 27.161,31.05 27.875,30.336 27.875,28.564 27.507,28.196 26.396,28.196 C20.1@26.375,28.175 v2(26.375,25.375)
  Top Layer w1: v2(8.529,14.885) 10.715,17.071 10.715,22.591 12.499,24.375 v7(15.015,24.375) 15.02,24.38 15.02,27.37 R11.1@15.025,27.375 ; U2.3@30.175,12.25 30.175,10.414 29.628,9.867 29.628,9.652 C17.1@29.351,9.375 29.351,9.199 30.882,7.668 34.819,7.668 36.351,9.199 38.875,6.675 38.875,0.775 C16.1@39.025,0.625 ; 34.75,1.025 35.5,0.275 C16.1@39.375,0.275 39.35,0.3 C16.1@39.025,0.3 ; C23.1@36.351,9.375 36.351,9.551 37.175,10.375 U6.3@37.175,12.25 ; v4(49.6,25.45) 55.925,25.45 v4(57.45,26.975)
  Bottom Layer w0.254: v2(8.359,8.204) 8.375,8.22 12.079,8.22 12.467,8.608 23.608,8.608 27.375,12.375 v2(30.375,12.375)
  Bottom Layer w0.4: P1.1@48.925,73.23 50.195,71.96 53.64,71.96 54.4,71.2 v4(54.4,64.825)
  Bottom Layer w1: v2@8.367,8.212 8.367,14.65 8.529,14.812 v2(8.529,14.885) ; v7(15.015,24.375) 25.375,24.375 26.413,25.413 49.562,25.413 v4(49.6,25.45) ; v1(30.85,-2.325) 32.5,-0.675 v1(32.5,0.275) ; v4(54.4,64.825) 53.6,64.025 53.6,46.825 57.45,42.975 v4(57.45,26.975)
pads on no net: P0.01 P4.3 P4.4 SW0.1 U1.55 U3.9 U5.8
copper on no net: | length 0.4
  Top Layer w0.254: 35.546,87.225 35.685,87.364 35.92,87.364
  other v3: 6.375,22.875 56.375,22.875 53.875,38.125 20.875,39.375 41.875,39.375 20.875,48.625 41.875,48.625 20.875,57.875 41.875,57.875 6.375,59.875 56.375,59.875
  other v6: 8.875,38.125

## Silkscreen, mask and mechanical layers (free items; w line width, h text height)
Top Overlay:
  lines w0.1: 5.775,59.875 6.375,59.875 6.6,59.875 ; 53.85,8.875 53.85,8.861 53.875,8.886
  lines w0.254: 20.872,39.381 20.878,39.375 ; 41.85,64.875 41.875,64.85 ; 20.875,57.875 20.875,57.875
  lines w0.3: 62.925,7.775 63.05,7.65
  text "RV" at 43.729,91.879 h1.52
  text "RV" at 16.354,91.579 h1.52
  text "SCL" at 30.421,87.154 h1.52 r90
  text "GND" at 35.629,87.141 h1.52 r90
  text "SDA" at 33.221,86.979 h1.52 r90
  text "VCC" at 27.971,86.804 h1.52 r90
  text "RV" at 57.229,84.879 h1.52
  text "RV" at 5.229,84.729 h1.52
  text "RX" at 45.129,81.104 h1.52
  text "-" at 54.279,80.368 h1.52
  text "TX" at 46.029,78.354 h1.52
  text "CLK" at 53.899,77.359 h1.52
  text "DIO" at 54.004,75.179 h1.52
  text "---" at 26.804,39.343 h1.52
  text "+" at 42.529,20.05 h1.52
  text "-" at 42.629,17.493 h1.52
  text "PWM" at 42.529,14.979 h1.52
  text "PWM" at 16.579,14.804 h1.52
  text "-" at 19.679,12.393 h1.52
  text "+" at 19.679,9.65 h1.52
  text "-" at 66.479,5.993 h1.52
  text "-" at -9.621,5.868 h1.52
  text "+" at 15.159,1.415 h1.52
  text "-" at 15.954,-5.407 h1.52
Mechanical 1:
  lines w0.1: 3.875,31.375 3.875,32.375 ; 3.875,45 3.9,44.975 ; 75.9,9.4 75.9,10.4
  lines w0.254: -12.875,10.375 -1.625,10.375 -0.125,10.375 ; -12.625,10.375 -13.125,10.375 -13.125,-0.125 -12.125,-1.124 -8.775,-1.124 ; -11.625,10.375 -2.625,10.375 ; -0.125,1.9 -0.125,8.375 ; -0.125,4.875 -0.125,-0.125 ; -0.1,-0.1 -0.125,-0.125 ; 3.85,10.375 -0.125,10.375 ; 58.9,10.4 62.9,10.4 ; 62.875,-0.125 58.875,-0.125 ; 67.25,-1.099 67.25,-1.1 ; 71.55,-1.099 71.55,-1.1 ; -8.775,-1.124 -8.775,-1.125 ; -8.775,-1.125 -4.475,-1.125 -1.125,-1.125 -0.125,-0.125 ; -0.125,-0.125 -0.125,10.375 ; -0.125,-0.125 3.875,-0.125 ; 3.875,-0.125 8.875,-5.125 9.875,-5.125 18.875,-5.125 19.875,-5.125 42.875,-5.125 43.875,-5.125 52.875,-5.125 53.875,-5.125 58.875,-0.125 ; 3.875,-0.125 3.875,64.875 -1.125,64.875 -3.625,64.875 -6.125,67.375 cw(c20.875,69.375) 18.875,96.375 43.875,96.375 cw(c41.875,69.375) 68.875,67.375 66.375,64.875 58.875,64.875 58.875,2.78 58.875,-0.125 ; 62.9,10.4 64.4,10.4 74.9,10.4 75.9,10.4 75.9,-0.1 74.9,-1.1 71.55,-1.1 ; 62.9,10.4 62.9,-0.1 63.9,-1.1 67.25,-1.1 ; 67.25,-1.1 71.55,-1.1